# Altium PCB Pedal_Filters.PcbDoc (part 1 of 4)
Units mm, origin at the board's own origin, x right, y up, seen from the top; angles counter-clockwise.
Board outline 120.65 x 86.55 mm, 4 copper layers (Top Layer, Layer 1, Layer 2, Bottom Layer); 245 components, 181 nets, 879 pads, 470 vias.
Unrouted connection lines stored in the file: 24.
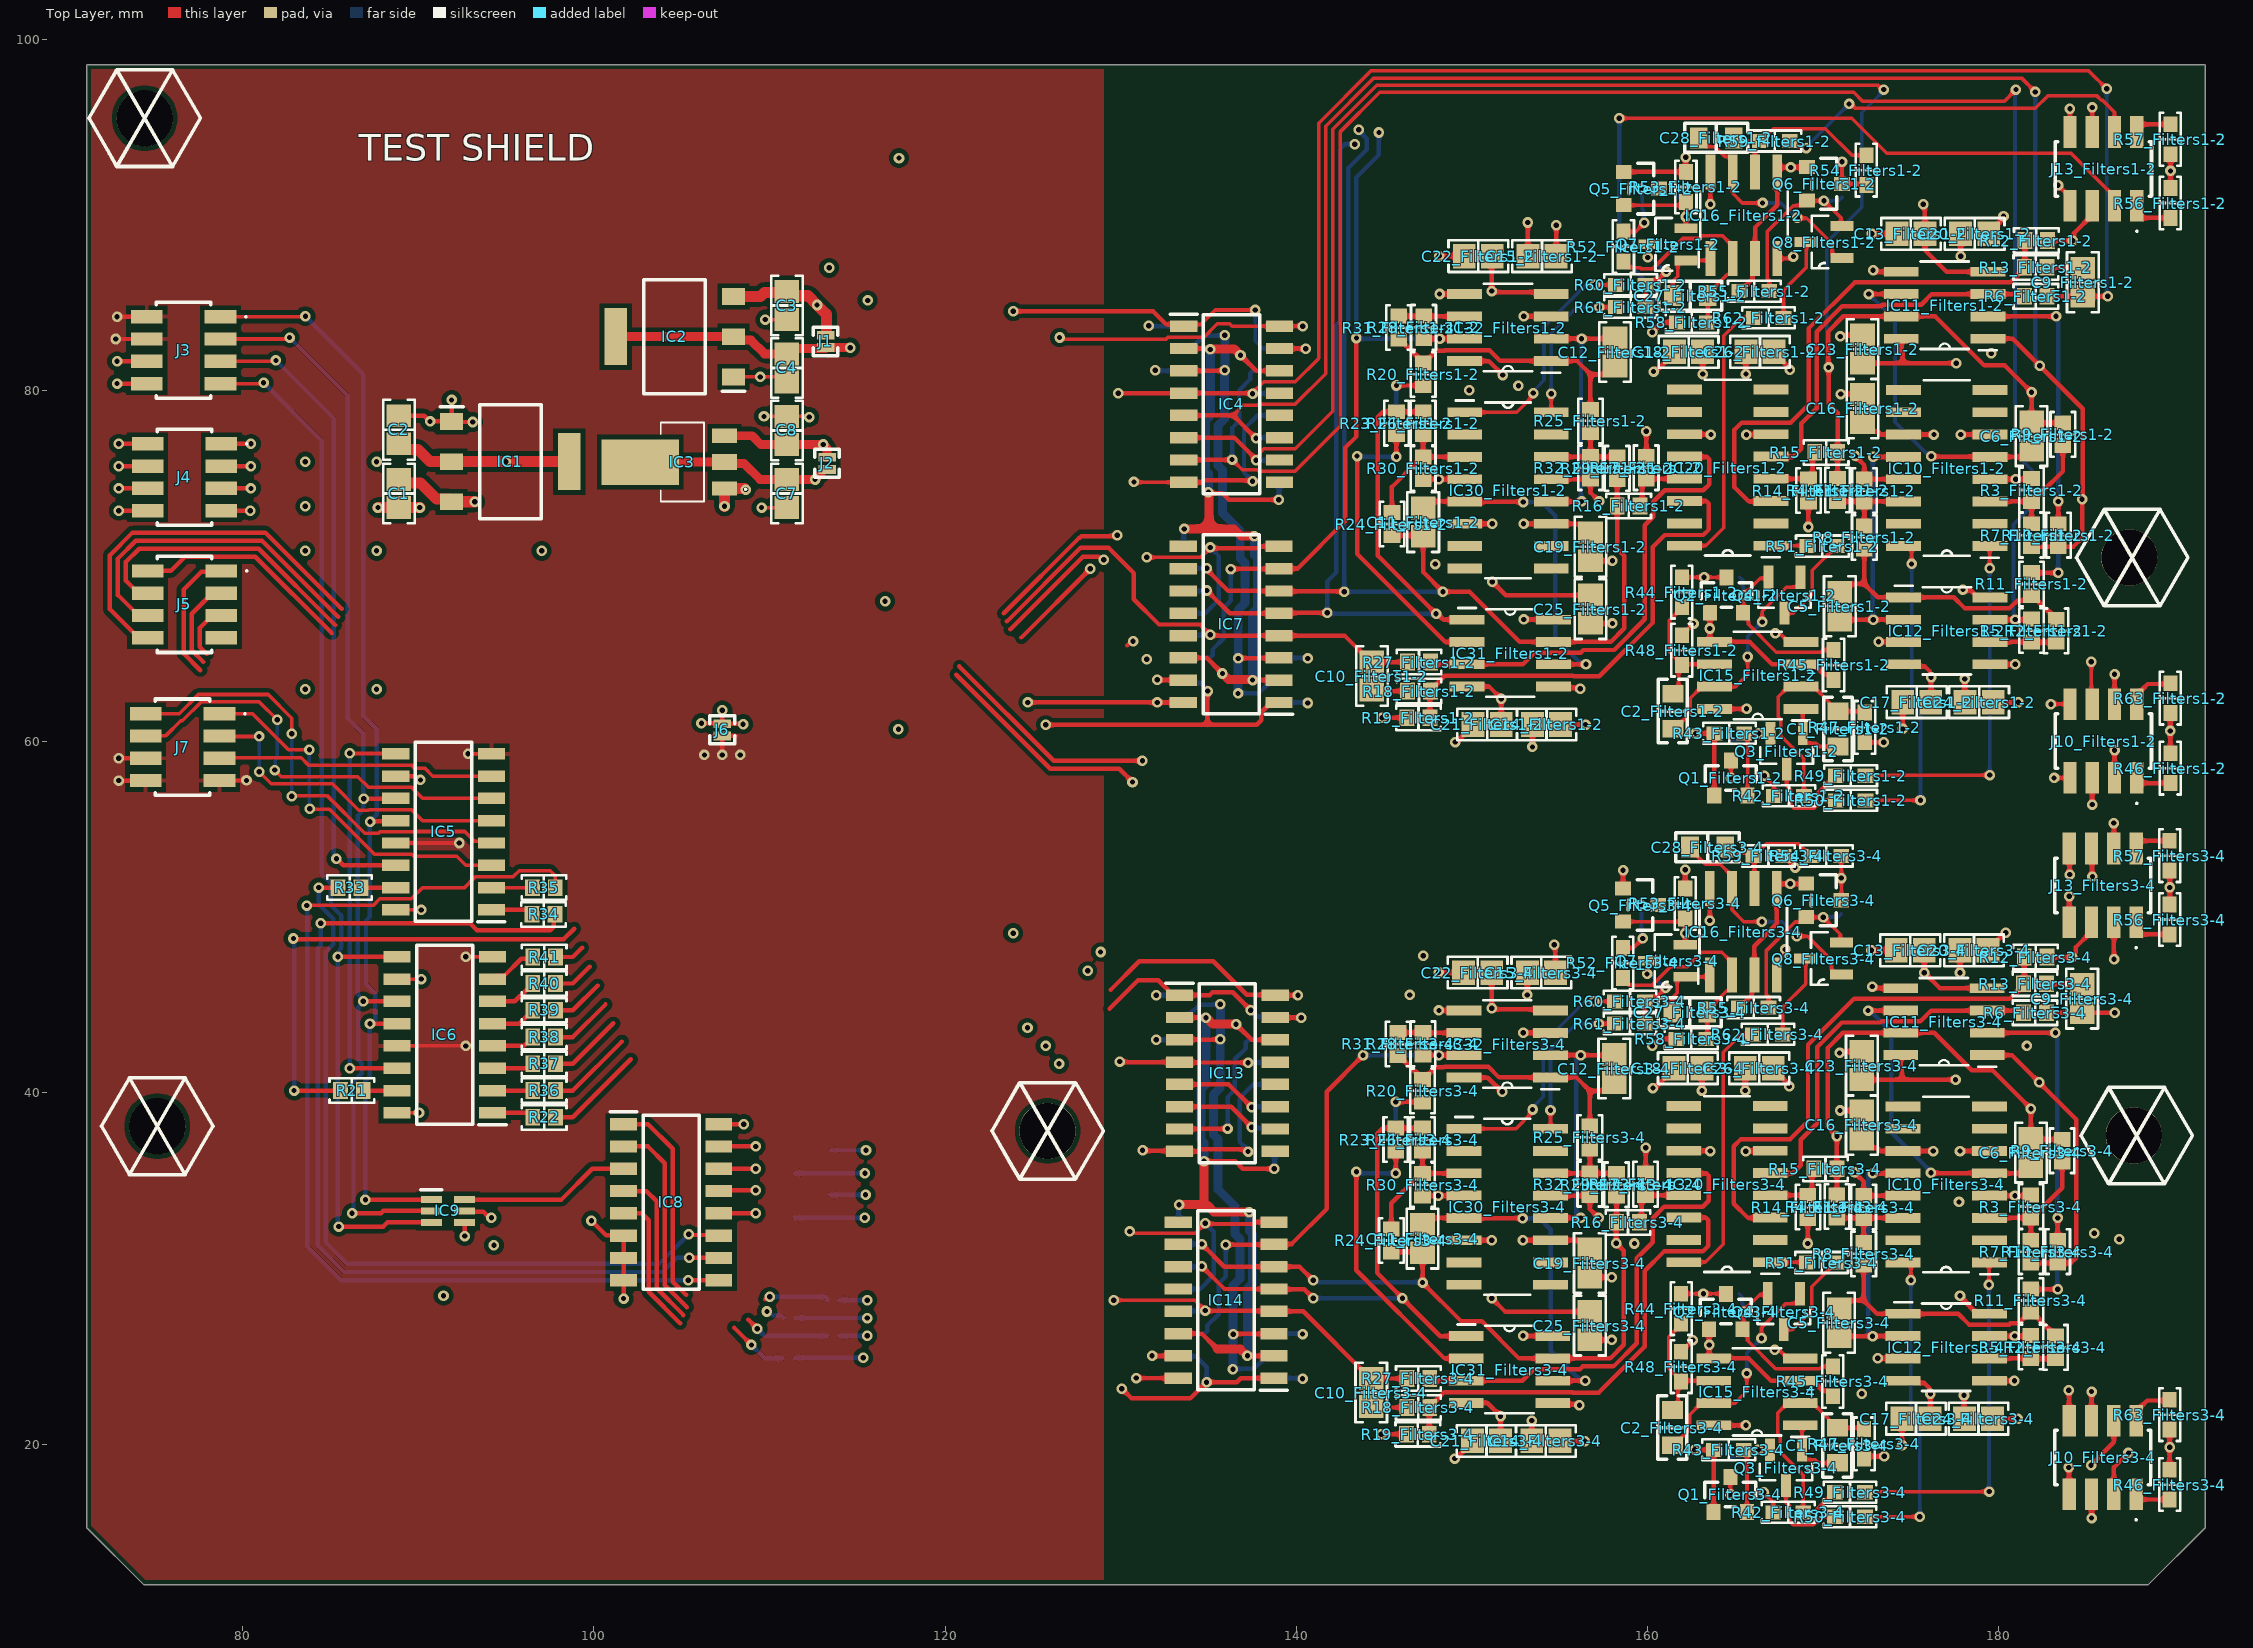
[diagram p0: Top Layer view]
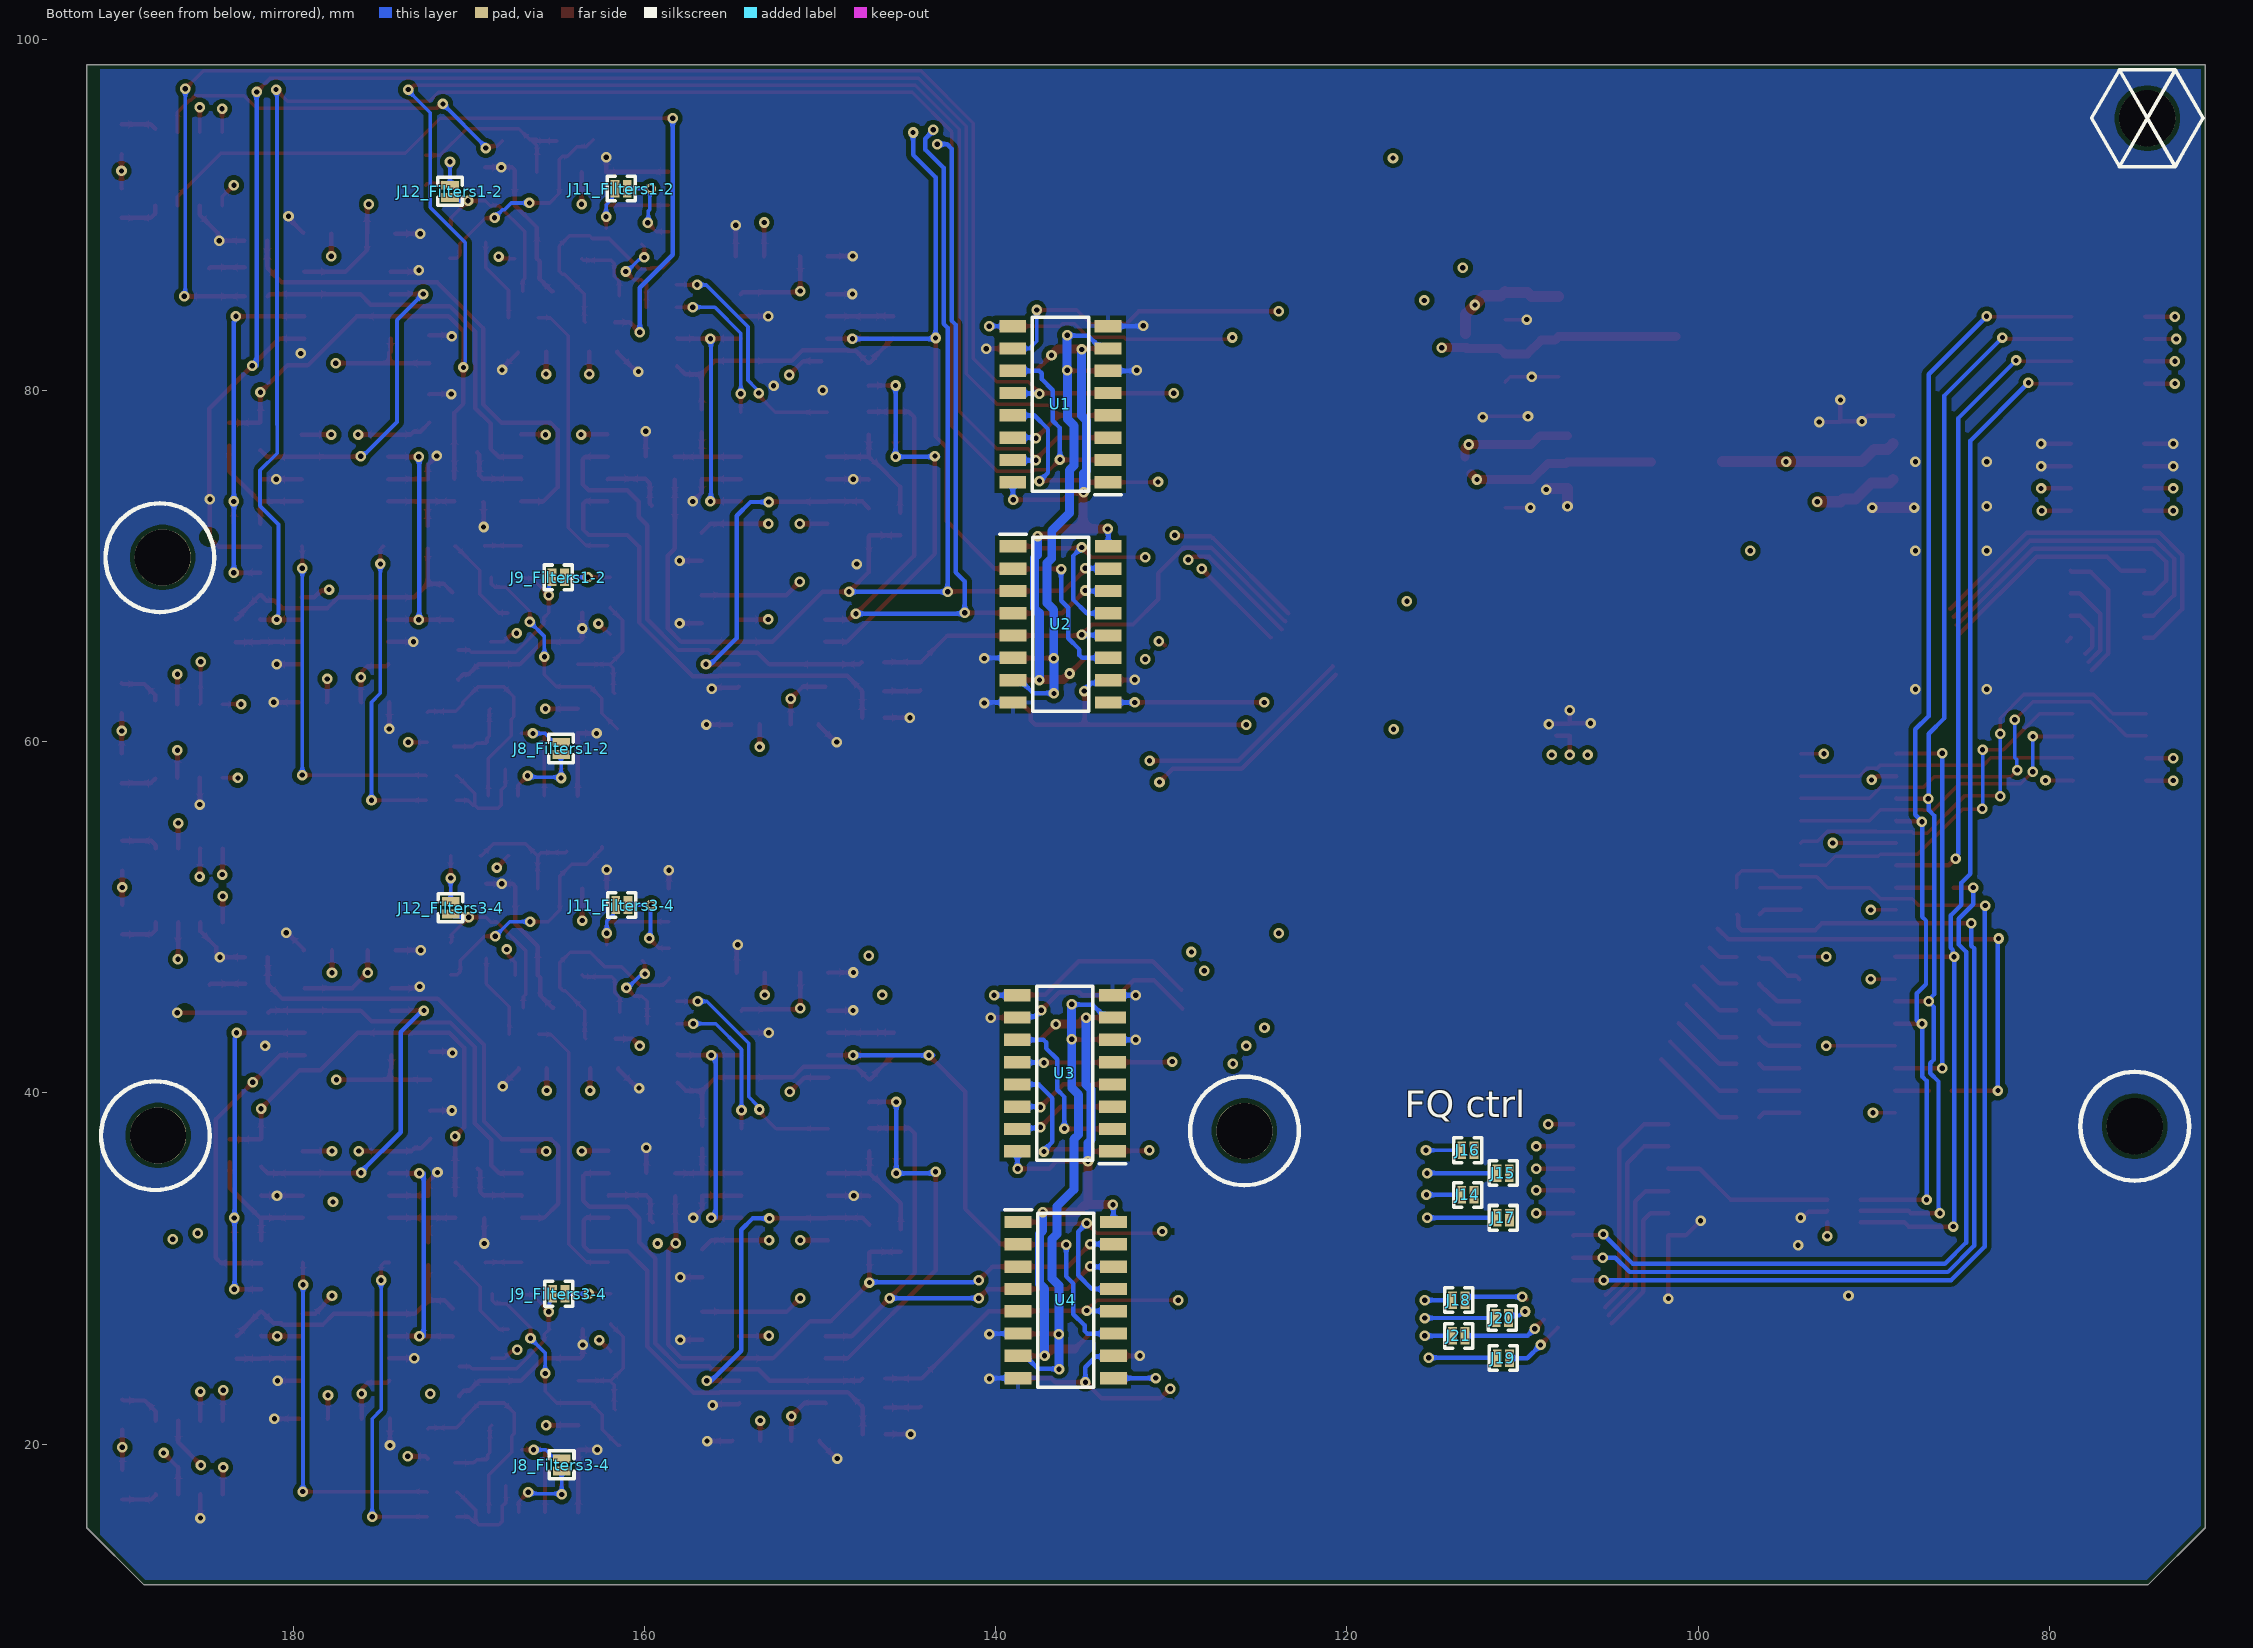
[diagram p1: Bottom Layer view, seen from below]
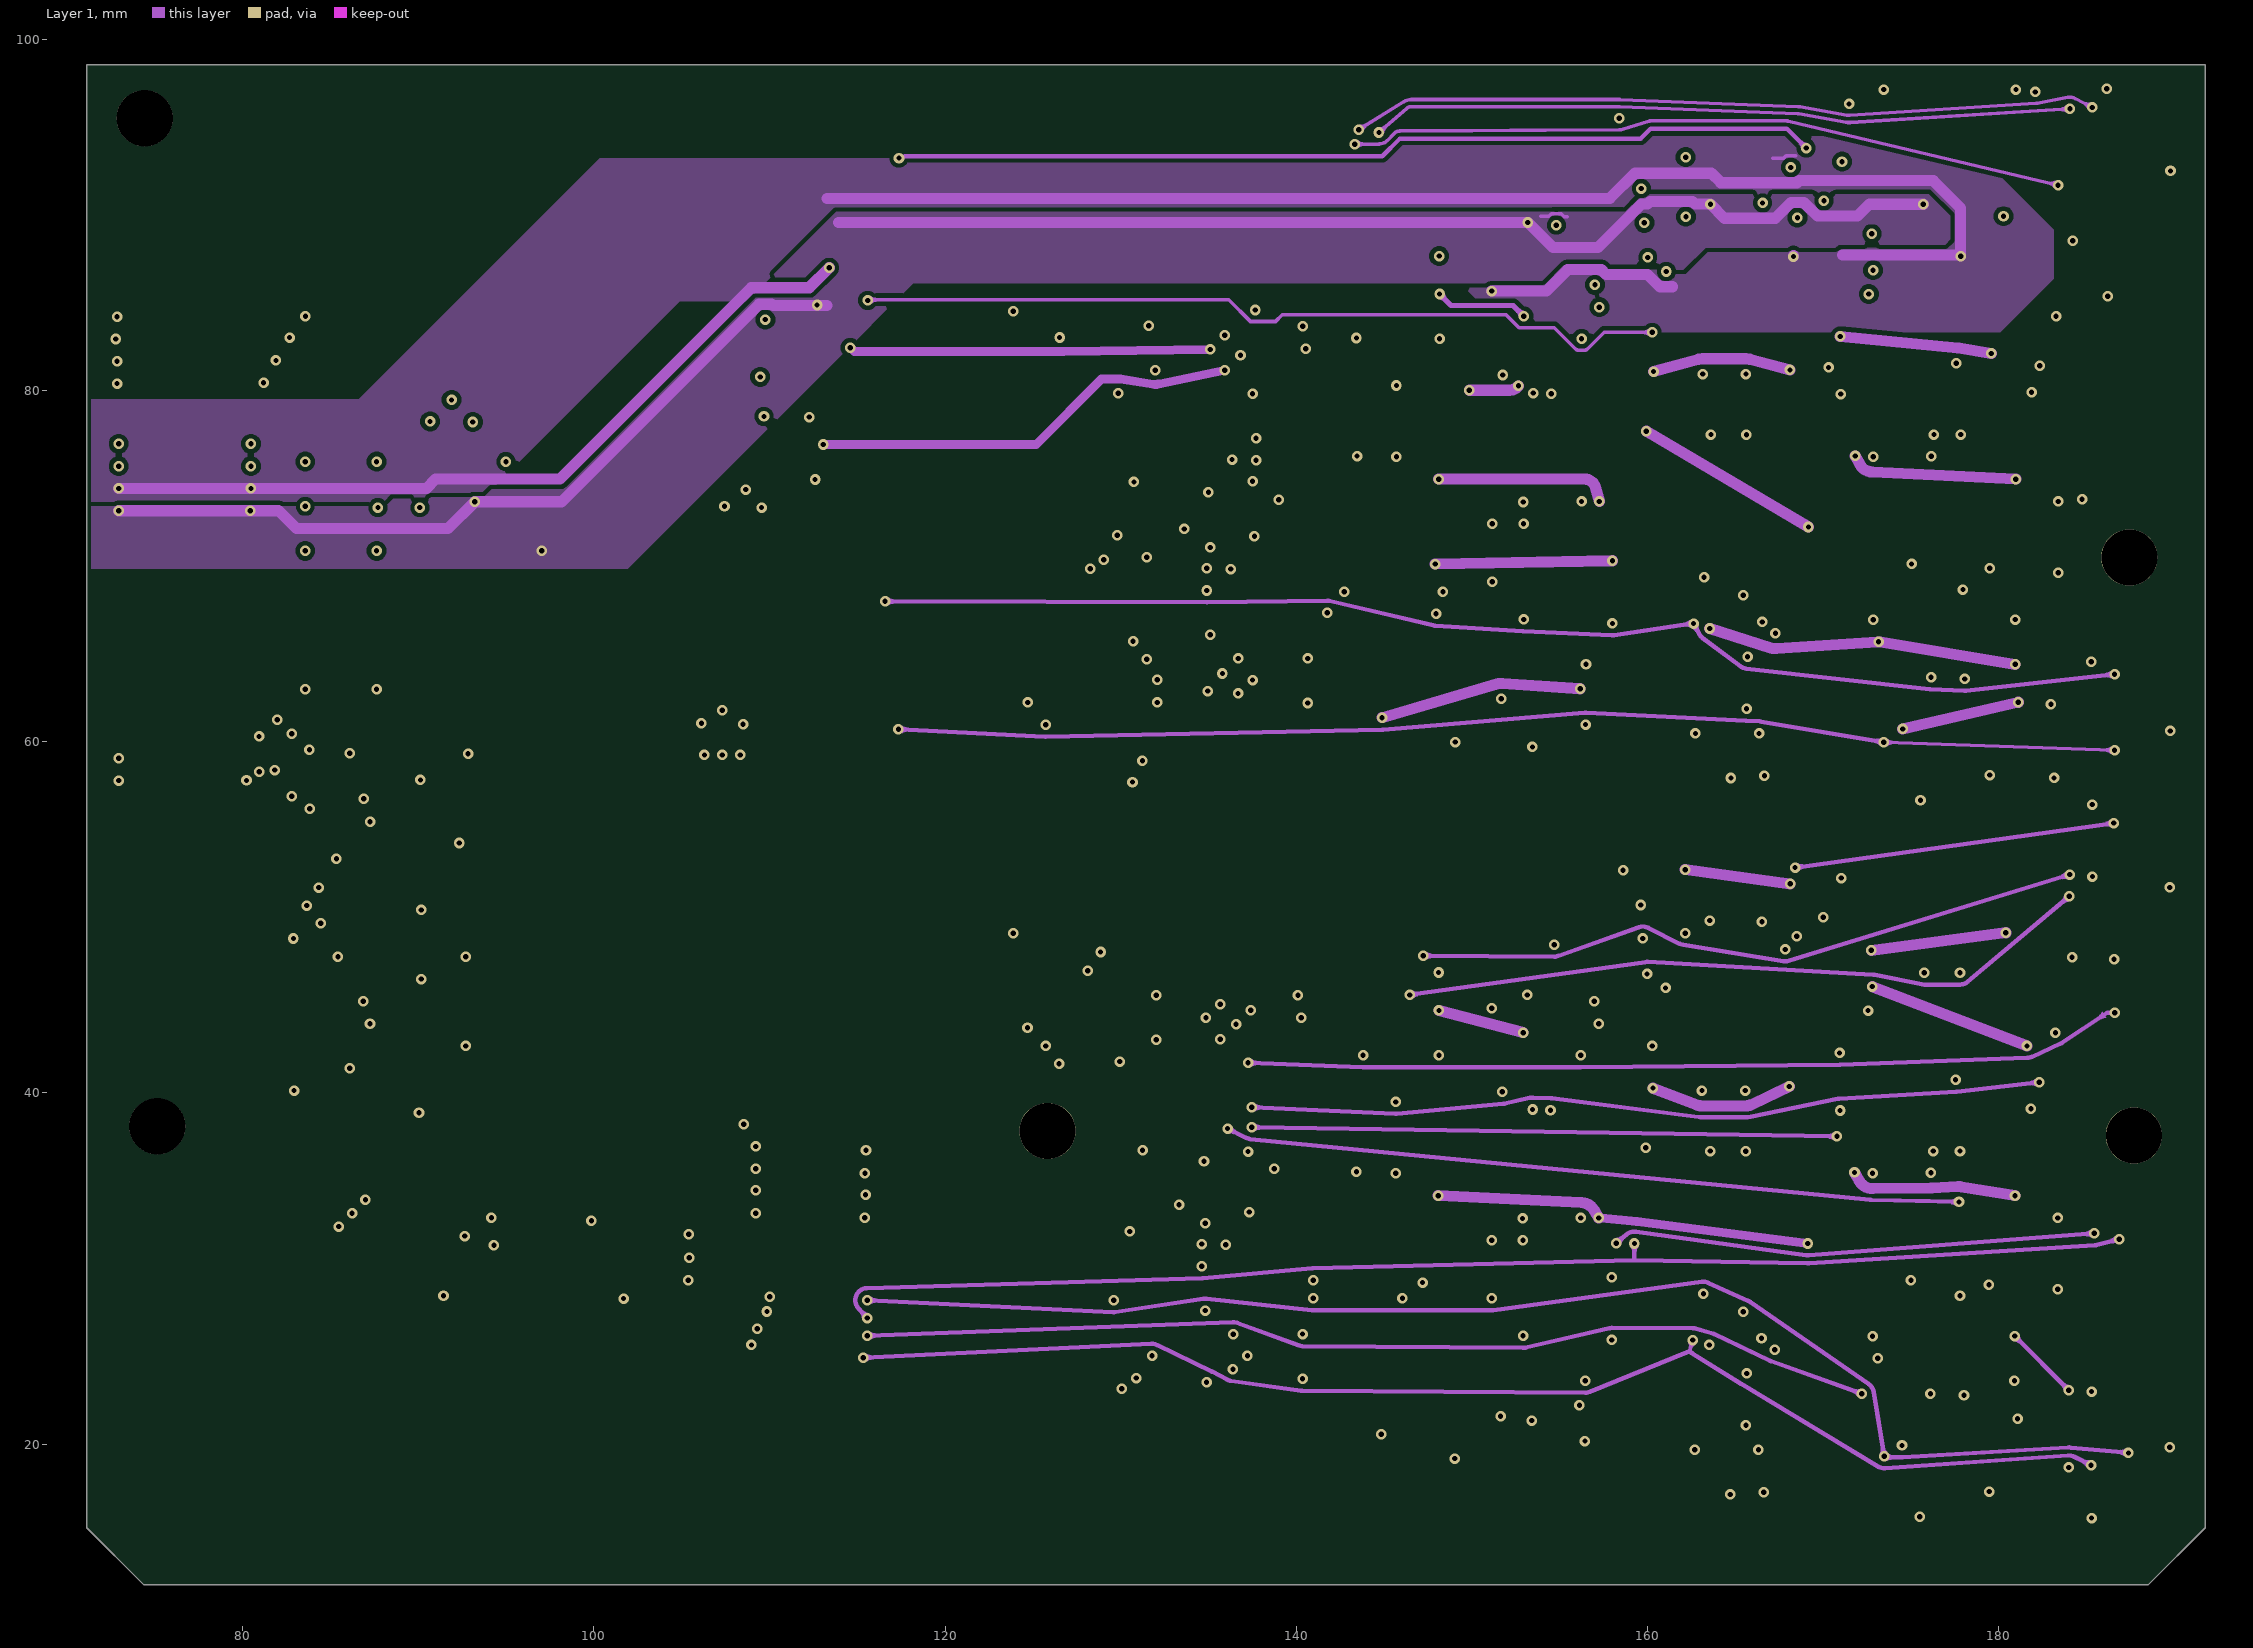
[diagram p2: Layer 1]
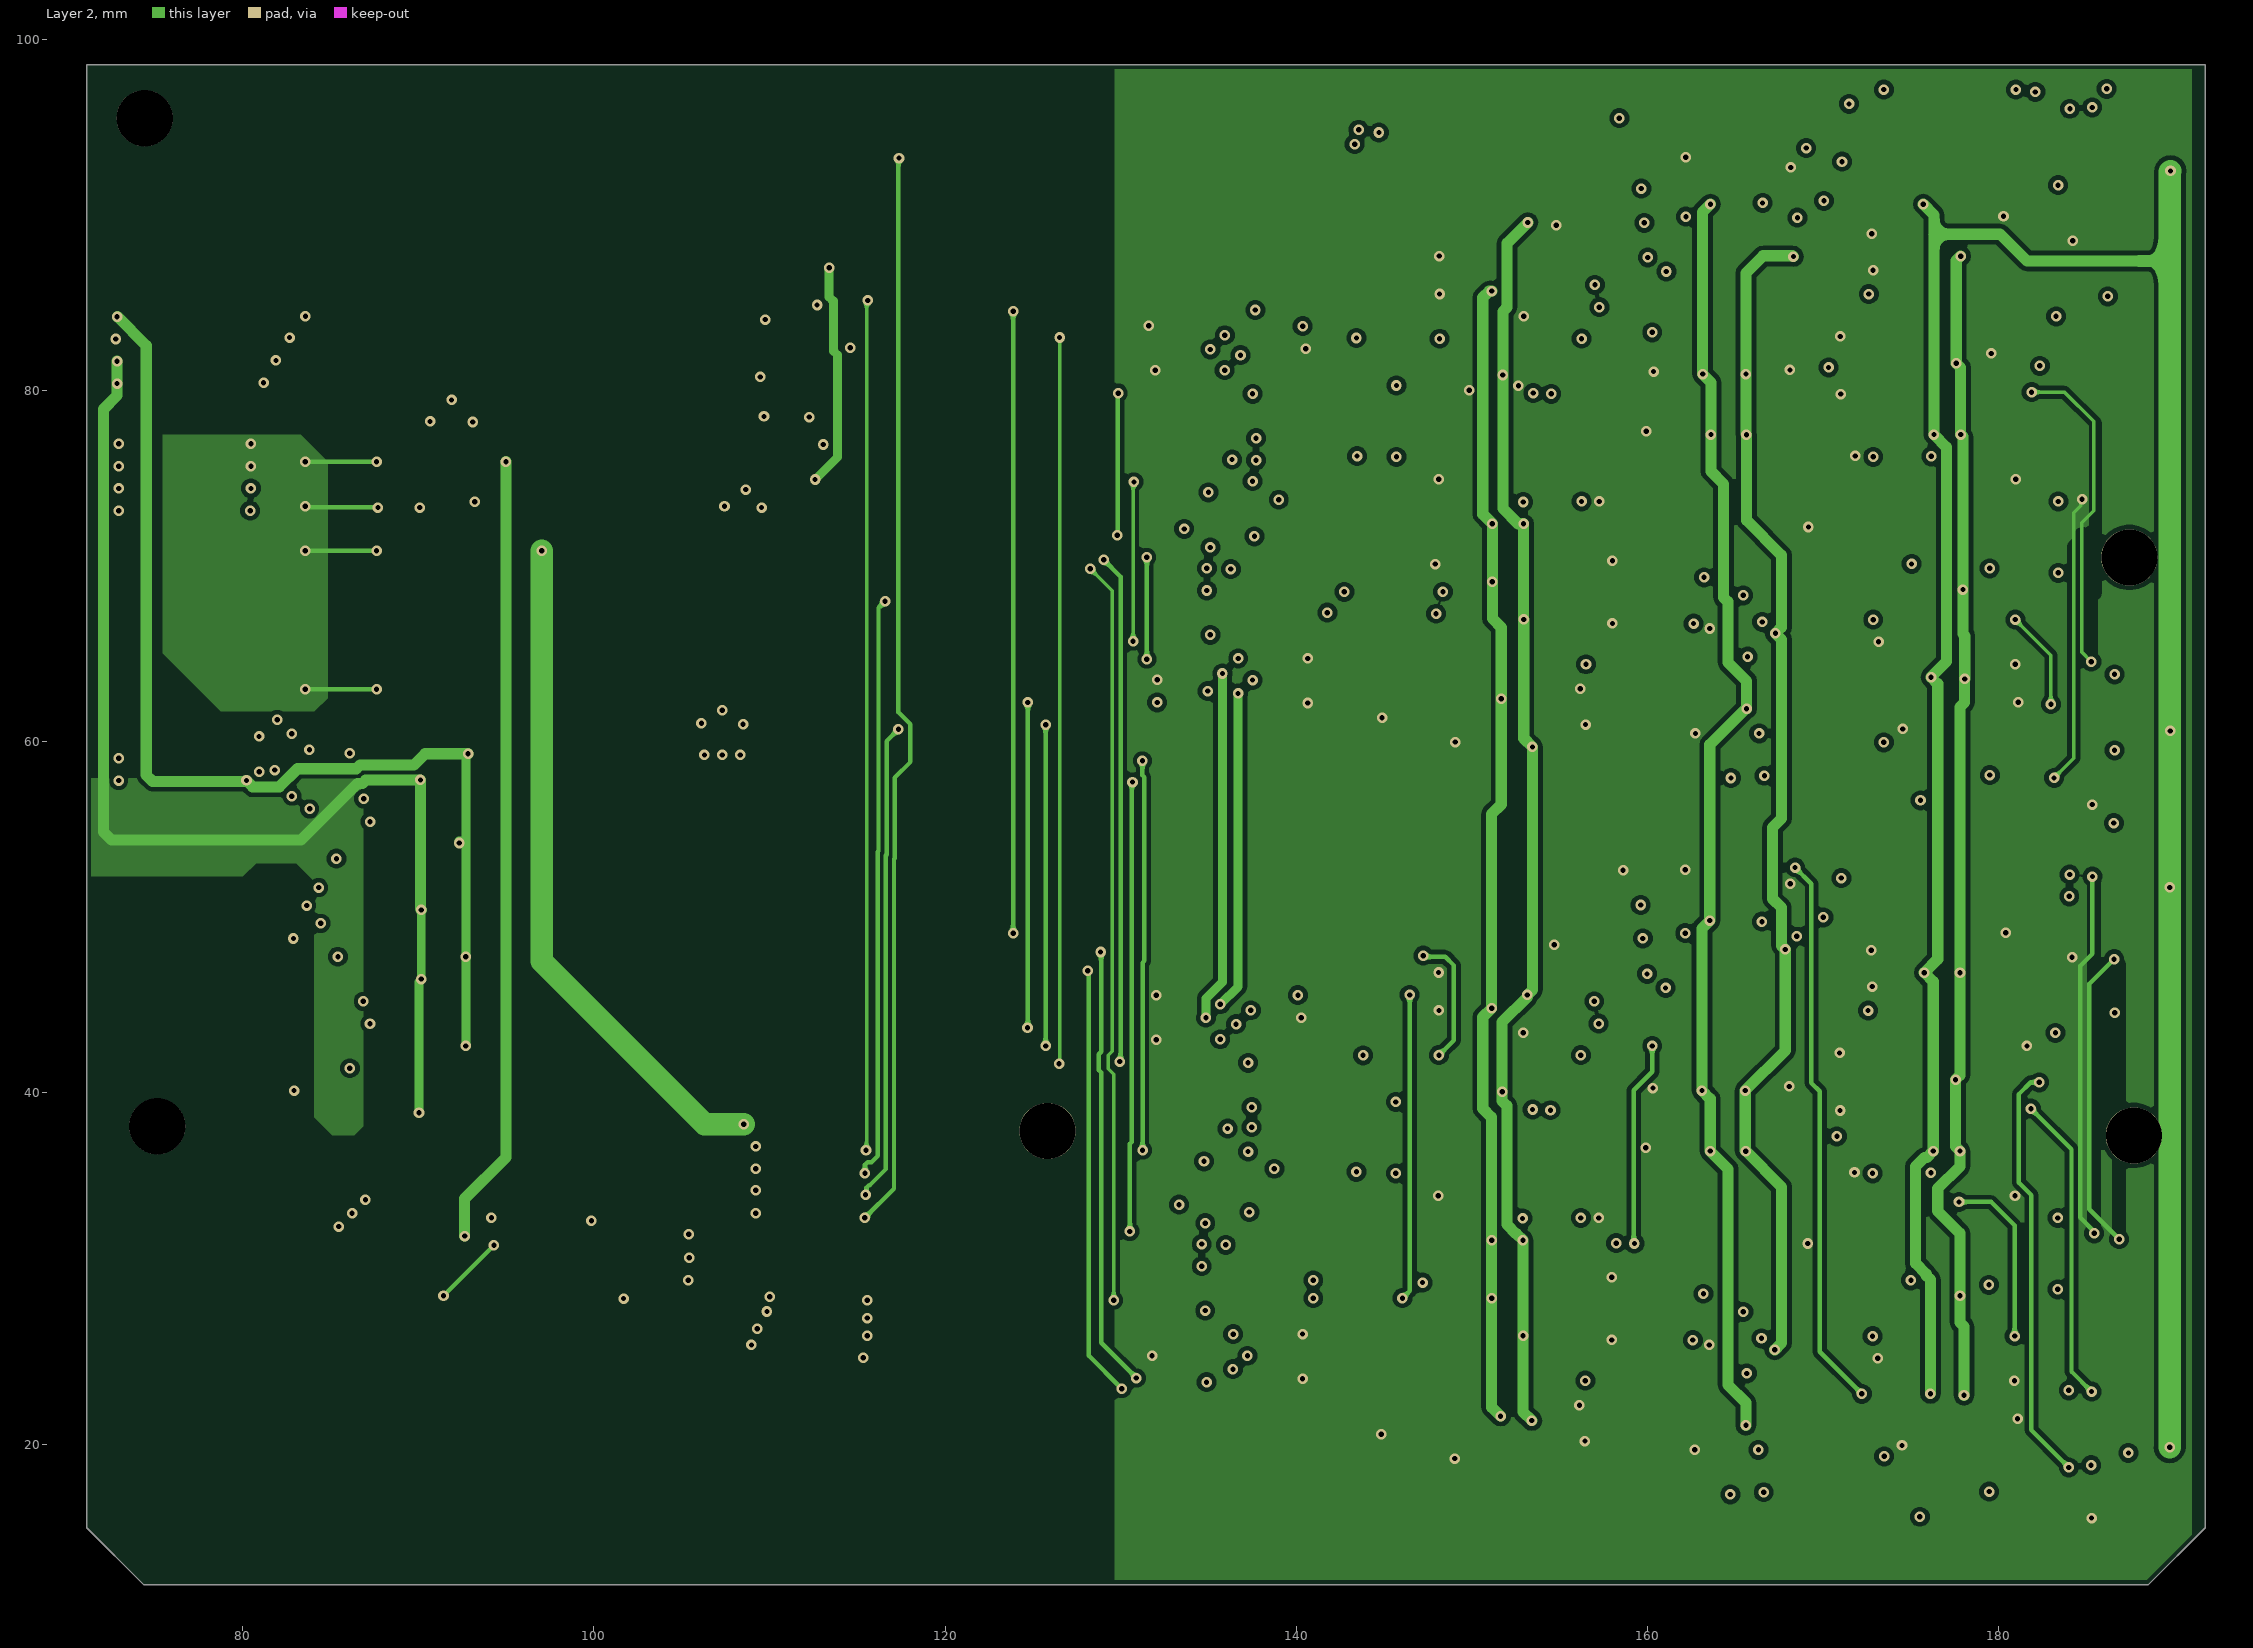
[diagram p3: Layer 2]
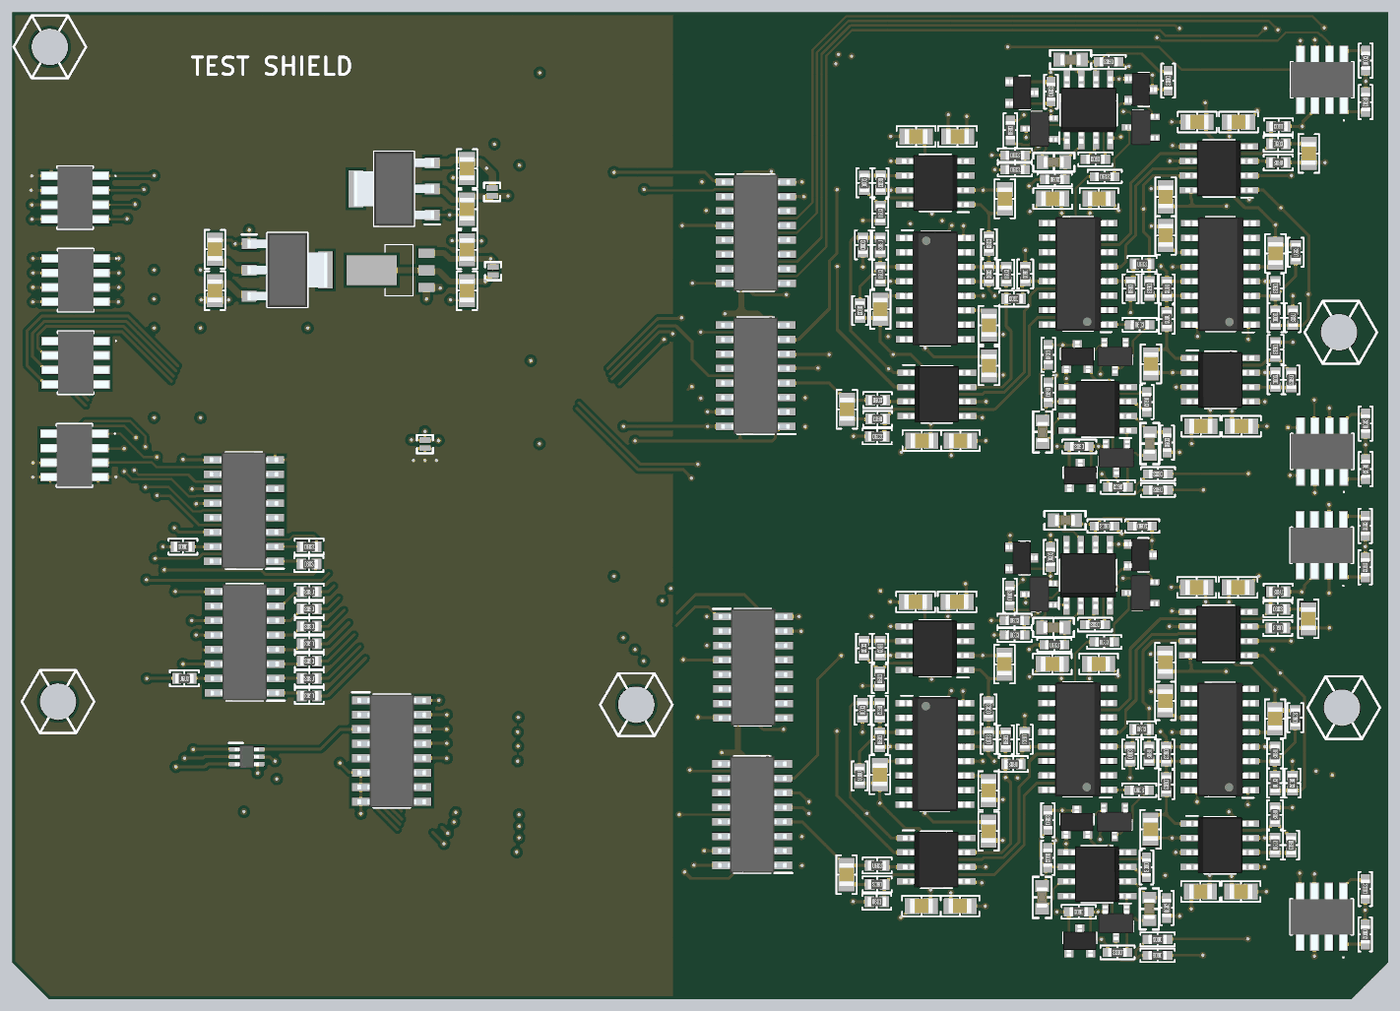
[diagram p7: 3D render of the assembled board from above, using the file's embedded part models]

## Layer stack, top to bottom
Top Solder: solder mask 0.0102, Solder Resist, Dk 3.5
Top Layer: signal copper 0.0356
Dielectric 2: prepreg 0.32, PP-006, Dk 4.1
Layer 1: signal copper 0.035
Dielectric 1: dielectric 0.32, FR-4, Dk 4.8
Layer 2: signal copper 0.035
Dielectric 3: prepreg 0.32, PP-006, Dk 4.1
Bottom Layer: signal copper 0.0356
Bottom Solder: solder mask 0.0102, Solder Resist, Dk 3.5

## Board outline
71.12,15.24 74.36,12 188.53,12 191.77,15.24 191.77,98.552 71.12,98.552

## Design rules (kind name [scope] priority, off if disabled: settings)
BoardOutlineClearance [All] p1: gap=0.254 ignorepadtopadclearanceinfootprint=FALSE except(0: Arc-SplitContinuation Track-SplitContinuation SMDPad-SplitContinuation THPad-SplitContinuation Via-SplitContinuation Fill-SplitContinuation Poly-SplitContinuation Region-SplitContinuation Text-SplitContinuation)
Clearance [All] p1: gap=0.254 ignorepadtopadclearanceinfootprint=TRUE except(0.203: Arc-Arc Arc-Track Arc-SMDPad Track-Track Track-SMDPad)
HoleSize [All] p1: absolutevalues=TRUE maxlimit=4 minlimit=0.025 maxpercent=80.000 minpercent=20.000
MinimumSolderMaskSliver [All] p1: minsoldermaskwidth=0.102
PolygonConnect PolygonConnect_11 [All vs InNet('+5v_DAC')] p1: thpad.connectstyle=Relief thpad.reliefconductorwidth=0.254 thpad.reliefentries=4 thpad.polygonreliefangle="90 Angle" thpad.airgapwidth=0.254 smdpad.connectstyle=Relief smdpad.reliefconductorwidth=0.254 smdpad.reliefentries=4 smdpad.polygonreliefangle="90 Angle" smdpad.airgapwidth=0.254 via.connectstyle=Direct via.reliefconductorwidth=0.254 via.reliefentries=4 via.polygonreliefangle="90 Angle" via.airgapwidth=0.254
PolygonConnect PolygonConnect_10 [All vs InNet('+5')] p2: thpad.connectstyle=Relief thpad.reliefconductorwidth=0.254 thpad.reliefentries=4 thpad.polygonreliefangle="90 Angle" thpad.airgapwidth=0.254 smdpad.connectstyle=Relief smdpad.reliefconductorwidth=0.254 smdpad.reliefentries=4 smdpad.polygonreliefangle="90 Angle" smdpad.airgapwidth=0.254 via.connectstyle=Direct via.reliefconductorwidth=0.254 via.reliefentries=4 via.polygonreliefangle="90 Angle" via.airgapwidth=0.254
PolygonConnect PolygonConnect_9 [All vs InNet('DGND')] p3: thpad.connectstyle=Relief thpad.reliefconductorwidth=0.254 thpad.reliefentries=4 thpad.polygonreliefangle="90 Angle" thpad.airgapwidth=0.254 smdpad.connectstyle=Relief smdpad.reliefconductorwidth=0.254 smdpad.reliefentries=4 smdpad.polygonreliefangle="90 Angle" smdpad.airgapwidth=0.254 via.connectstyle=Direct via.reliefconductorwidth=0.254 via.reliefentries=4 via.polygonreliefangle="90 Angle" via.airgapwidth=0.254
PolygonConnect PolygonConnect_8 [All vs InNet('GND')] p4: thpad.connectstyle=Relief thpad.reliefconductorwidth=0.254 thpad.reliefentries=4 thpad.polygonreliefangle="90 Angle" thpad.airgapwidth=0.254 smdpad.connectstyle=Relief smdpad.reliefconductorwidth=0.254 smdpad.reliefentries=4 smdpad.polygonreliefangle="90 Angle" smdpad.airgapwidth=0.254 via.connectstyle=Direct via.reliefconductorwidth=0.254 via.reliefentries=4 via.polygonreliefangle="90 Angle" via.airgapwidth=0.254
PolygonConnect PolygonConnect_7 [All vs InNet('+12')] p5: thpad.connectstyle=Relief thpad.reliefconductorwidth=0.254 thpad.reliefentries=4 thpad.polygonreliefangle="90 Angle" thpad.airgapwidth=0.254 smdpad.connectstyle=Relief smdpad.reliefconductorwidth=0.254 smdpad.reliefentries=4 smdpad.polygonreliefangle="90 Angle" smdpad.airgapwidth=0.254 via.connectstyle=Direct via.reliefconductorwidth=0.254 via.reliefentries=4 via.polygonreliefangle="90 Angle" via.airgapwidth=0.254
PolygonConnect PolygonConnect_6 [All vs InNet('-12')] p6: thpad.connectstyle=Relief thpad.reliefconductorwidth=0.254 thpad.reliefentries=4 thpad.polygonreliefangle="90 Angle" thpad.airgapwidth=0.254 smdpad.connectstyle=Relief smdpad.reliefconductorwidth=0.254 smdpad.reliefentries=4 smdpad.polygonreliefangle="90 Angle" smdpad.airgapwidth=0.254 via.connectstyle=Direct via.reliefconductorwidth=0.254 via.reliefentries=4 via.polygonreliefangle="90 Angle" via.airgapwidth=0.254
PolygonConnect PolygonConnect_5 [All vs IsNamedPolygon('+V_MUX')] p7: thpad.connectstyle=Relief thpad.reliefconductorwidth=0.254 thpad.reliefentries=4 thpad.polygonreliefangle="90 Angle" thpad.airgapwidth=0.254 smdpad.connectstyle=Direct smdpad.reliefconductorwidth=0.254 smdpad.reliefentries=4 smdpad.polygonreliefangle="90 Angle" smdpad.airgapwidth=0.254 via.connectstyle=Direct via.reliefconductorwidth=0.254 via.reliefentries=4 via.polygonreliefangle="90 Angle" via.airgapwidth=0.254
PolygonConnect PolygonConnect_4 [All vs IsNamedPolygon('-V_MUX')] p8: thpad.connectstyle=Relief thpad.reliefconductorwidth=0.254 thpad.reliefentries=4 thpad.polygonreliefangle="90 Angle" thpad.airgapwidth=0.254 smdpad.connectstyle=Direct smdpad.reliefconductorwidth=0.254 smdpad.reliefentries=4 smdpad.polygonreliefangle="90 Angle" smdpad.airgapwidth=0.254 via.connectstyle=Direct via.reliefconductorwidth=0.254 via.reliefentries=4 via.polygonreliefangle="90 Angle" via.airgapwidth=0.254
PolygonConnect PolygonConnect_3 [All vs IsNamedPolygon('NETD1_1_L01_P003')] p9: thpad.connectstyle=Relief thpad.reliefconductorwidth=0.254 thpad.reliefentries=4 thpad.polygonreliefangle="90 Angle" thpad.airgapwidth=0.254 smdpad.connectstyle=Direct smdpad.reliefconductorwidth=0.254 smdpad.reliefentries=4 smdpad.polygonreliefangle="90 Angle" smdpad.airgapwidth=0.254 via.connectstyle=Direct via.reliefconductorwidth=0.254 via.reliefentries=4 via.polygonreliefangle="90 Angle" via.airgapwidth=0.254
PolygonConnect PolygonConnect_2 [All vs IsNamedPolygon('GND_L01_P005')] p10: thpad.connectstyle=Relief thpad.reliefconductorwidth=0.254 thpad.reliefentries=4 thpad.polygonreliefangle="90 Angle" thpad.airgapwidth=0.254 smdpad.connectstyle=Direct smdpad.reliefconductorwidth=0.254 smdpad.reliefentries=4 smdpad.polygonreliefangle="90 Angle" smdpad.airgapwidth=0.254 via.connectstyle=Direct via.reliefconductorwidth=0.254 via.reliefentries=4 via.polygonreliefangle="90 Angle" via.airgapwidth=0.254
PolygonConnect PolygonConnect_1 [All vs IsNamedPolygon('6V6_L01_P001')] p11: thpad.connectstyle=Relief thpad.reliefconductorwidth=0.254 thpad.reliefentries=4 thpad.polygonreliefangle="90 Angle" thpad.airgapwidth=0.254 smdpad.connectstyle=Direct smdpad.reliefconductorwidth=0.254 smdpad.reliefentries=4 smdpad.polygonreliefangle="90 Angle" smdpad.airgapwidth=0.254 via.connectstyle=Direct via.reliefconductorwidth=0.254 via.reliefentries=4 via.polygonreliefangle="90 Angle" via.airgapwidth=0.254
PolygonConnect [All] p12: connectstyle=Relief reliefconductorwidth=0.254 reliefentries=4 polygonreliefangle="90 Angle" airgapwidth=0.254
RoomDefinition Filters3-4 [InComponentClass('Filters3-4')] p1: confinementstyle=ConfineIn formatcopy=TRUE lockcomponents=FALSE outline 142.748,15.143 190.754,15.143 190.754,55.504 142.748,55.504
RoomDefinition Filters1-2 [InComponentClass('Filters1-2')] p2: confinementstyle=ConfineIn formatcopy=TRUE lockcomponents=FALSE outline 142.786,55.944 190.792,55.944 190.792,96.305 142.786,96.305
RoomDefinition Pedal_Filters [InComponentClass('Pedal_Filters')] p3: confinementstyle=ConfineIn formatcopy=TRUE lockcomponents=FALSE outline 0,0 50.8,0 50.8,25.4 0,25.4
RoutingVias [All] p1: holewidth=0.3 width=0.6 viastyle="Through Hole" minholewidth=0.3 minwidth=0.6 maxholewidth=0.3 maxwidth=0.6
SolderMaskExpansion [All] p1: expansion=0.051 istentingtop=FALSE
Width [All] p1: maxlimit=1.27 minlimit=0.203 preferedwidth=0.203
28 further rules are at their usual default settings.

## Classes and differential pairs
channel class 2Filters: Filters1-2 Filters3-4
component class Filters3-4: C1_Filters3-4 C2_Filters3-4 C5_Filters3-4 C6_Filters3-4 C9_Filters3-4 C10_Filters3-4 C11_Filters3-4 C12_Filters3-4 C13_Filters3-4 C14_Filters3-4 C15_Filters3-4 C16_Filters3-4 C17_Filters3-4 C18_Filters3-4 C19_Filters3-4 C20_Filters3-4 C21_Filters3-4 C22_Filters3-4 C23_Filters3-4 C24_Filters3-4 C25_Filters3-4 C26_Filters3-4 C27_Filters3-4 C28_Filters3-4 IC10_Filters3-4 IC11_Filters3-4 IC12_Filters3-4 IC15_Filters3-4 IC16_Filters3-4 IC20_Filters3-4 IC30_Filters3-4 IC31_Filters3-4 IC32_Filters3-4 J8_Filters3-4 J9_Filters3-4 J10_Filters3-4 J11_Filters3-4 J12_Filters3-4 J13_Filters3-4 Q1_Filters3-4 Q2_Filters3-4 Q3_Filters3-4 Q4_Filters3-4 Q5_Filters3-4 Q6_Filters3-4 Q7_Filters3-4 Q8_Filters3-4 R1_Filters3-4 R2_Filters3-4 R3_Filters3-4 R4_Filters3-4 R5_Filters3-4 R6_Filters3-4 R7_Filters3-4 R8_Filters3-4 R9_Filters3-4 R10_Filters3-4 R11_Filters3-4 R12_Filters3-4 R13_Filters3-4 R14_Filters3-4 R15_Filters3-4 R16_Filters3-4 R17_Filters3-4 R18_Filters3-4 R19_Filters3-4 R20_Filters3-4 R23_Filters3-4 R24_Filters3-4 R25_Filters3-4 R26_Filters3-4 R27_Filters3-4 R28_Filters3-4 R29_Filters3-4 R30_Filters3-4 R31_Filters3-4 R32_Filters3-4 R42_Filters3-4 R43_Filters3-4 R44_Filters3-4 R45_Filters3-4 R46_Filters3-4 R47_Filters3-4 R48_Filters3-4 R49_Filters3-4 R50_Filters3-4 R51_Filters3-4 R52_Filters3-4 R53_Filters3-4 R54_Filters3-4 R55_Filters3-4 R56_Filters3-4 R57_Filters3-4 R58_Filters3-4 R59_Filters3-4 R60_Filters3-4 R61_Filters3-4 R62_Filters3-4 R63_Filters3-4
component class Filters1-2: C1_Filters1-2 C2_Filters1-2 C5_Filters1-2 C6_Filters1-2 C9_Filters1-2 C10_Filters1-2 C11_Filters1-2 C12_Filters1-2 C13_Filters1-2 C14_Filters1-2 C15_Filters1-2 C16_Filters1-2 C17_Filters1-2 C18_Filters1-2 C19_Filters1-2 C20_Filters1-2 C21_Filters1-2 C22_Filters1-2 C23_Filters1-2 C24_Filters1-2 C25_Filters1-2 C26_Filters1-2 C27_Filters1-2 C28_Filters1-2 IC10_Filters1-2 IC11_Filters1-2 IC12_Filters1-2 IC15_Filters1-2 IC16_Filters1-2 IC20_Filters1-2 IC30_Filters1-2 IC31_Filters1-2 IC32_Filters1-2 J8_Filters1-2 J9_Filters1-2 J10_Filters1-2 J11_Filters1-2 J12_Filters1-2 J13_Filters1-2 Q1_Filters1-2 Q2_Filters1-2 Q3_Filters1-2 Q4_Filters1-2 Q5_Filters1-2 Q6_Filters1-2 Q7_Filters1-2 Q8_Filters1-2 R1_Filters1-2 R2_Filters1-2 R3_Filters1-2 R4_Filters1-2 R5_Filters1-2 R6_Filters1-2 R7_Filters1-2 R8_Filters1-2 R9_Filters1-2 R10_Filters1-2 R11_Filters1-2 R12_Filters1-2 R13_Filters1-2 R14_Filters1-2 R15_Filters1-2 R16_Filters1-2 R17_Filters1-2 R18_Filters1-2 R19_Filters1-2 R20_Filters1-2 R23_Filters1-2 R24_Filters1-2 R25_Filters1-2 R26_Filters1-2 R27_Filters1-2 R28_Filters1-2 R29_Filters1-2 R30_Filters1-2 R31_Filters1-2 R32_Filters1-2 R42_Filters1-2 R43_Filters1-2 R44_Filters1-2 R45_Filters1-2 R46_Filters1-2 R47_Filters1-2 R48_Filters1-2 R49_Filters1-2 R50_Filters1-2 R51_Filters1-2 R52_Filters1-2 R53_Filters1-2 R54_Filters1-2 R55_Filters1-2 R56_Filters1-2 R57_Filters1-2 R58_Filters1-2 R59_Filters1-2 R60_Filters1-2 R61_Filters1-2 R62_Filters1-2 R63_Filters1-2
component class Pedal_Filters: C1 C2 C3 C4 C7 C8 IC1 IC2 IC3 IC4 IC5 IC6 IC7 IC8 IC9 IC13 IC14 J1 J2 J3 J4 J5 J7 J14 J15 J16 J17 J18 J19 J20 J21 R21 R22 R33 R34 R35 R36 R37 R38 R39 R40 R41 U1 U2 U3 U4

## Components (designator, comment, footprint, x,y, rotation, side; value= is the part's Value field where it differs from the comment)
C1 "=VALUE" "CAP 0805_2012" 88.9,74.13 r90 top
C1_Filters1-2 "10000 pF" "MURATA GRM188 0603_1608" 170.853,60.725 r90 top (schematic designator C1)
C1_Filters3-4 "10000 pF" "MURATA GRM188 0603_1608" 170.815,19.924 r90 top (schematic designator C1)
C2 "=VALUE" "CAP 0805_2012" 88.9,77.762 r270 top
C2_Filters1-2 "10000 pF" "MURATA GRM188 0603_1608" 161.455,61.741 r90 top (schematic designator C2)
C2_Filters3-4 "10000 pF" "MURATA GRM188 0603_1608" 161.417,20.94 r90 top (schematic designator C2)
C3 "=VALUE" "CAP 0805_2012" 110.998,84.836 r270 top
C4 "=VALUE" "CAP 0805_2012" 110.998,81.28 r90 top
C5_Filters1-2 "Value" "CAP 0805_2012" 170.955,67.71 r270 top (schematic designator C5)
C5_Filters3-4 "Value" "CAP 0805_2012" 170.917,26.909 r270 top (schematic designator C5)
C6_Filters1-2 "Value" "CAP 0805_2012" 181.877,77.4 r270 top (schematic designator C6)
C6_Filters3-4 "Value" "CAP 0805_2012" 181.839,36.599 r270 top (schematic designator C6)
C7 "=VALUE" "CAP 0805_2012" 110.998,74.13 r270 top
C8 "=VALUE" "CAP 0805_2012" 110.998,77.724 r90 top
C9_Filters1-2 "Value" "CAP 0805_2012" 184.798,86.163 r270 top (schematic designator C9)
C9_Filters3-4 "Value" "CAP 0805_2012" 184.76,45.362 r270 top (schematic designator C9)
C10_Filters1-2 "Value" "CAP 0805_2012" 144.31,63.735 r90 top (schematic designator C10)
C10_Filters3-4 "Value" "CAP 0805_2012" 144.272,22.934 r90 top (schematic designator C10)
C11_Filters1-2 "Value" "CAP 0805_2012" 147.231,72.498 r90 top (schematic designator C11)
C11_Filters3-4 "Value" "CAP 0805_2012" 147.193,31.697 r90 top (schematic designator C11)
C12_Filters1-2 "Value" "CAP 0805_2012" 158.153,82.188 r90 top (schematic designator C12)
C12_Filters3-4 "Value" "CAP 0805_2012" 158.115,41.387 r90 top (schematic designator C12)
C13_Filters1-2 "Value" "CAP 0805_2012" 175.006,88.919 r180 top (schematic designator C13)
C13_Filters3-4 "Value" "CAP 0805_2012" 174.968,48.118 r180 top (schematic designator C13)
C14_Filters1-2 "Value" "CAP 0805_2012" 154.254,60.979 r0 top (schematic designator C14)
C14_Filters3-4 "Value" "CAP 0805_2012" 154.216,20.178 r0 top (schematic designator C14)
C15_Filters1-2 "Value" "CAP 0805_2012" 154,87.649 r0 top (schematic designator C15)
C15_Filters3-4 "Value" "CAP 0805_2012" 153.962,46.848 r0 top (schematic designator C15)
C16_Filters1-2 "Value" "CAP 0805_2012" 172.25,78.975 r90 top (schematic designator C16)
C16_Filters3-4 "Value" "CAP 0805_2012" 172.212,38.174 r90 top (schematic designator C16)
C17_Filters1-2 "Value" "CAP 0805_2012" 175.336,62.249 r180 top (schematic designator C17)
C17_Filters3-4 "Value" "CAP 0805_2012" 175.298,21.448 r180 top (schematic designator C17)
C18_Filters1-2 "Value" "CAP 0805_2012" 162.344,82.203 r180 top (schematic designator C18)
C18_Filters3-4 "Value" "CAP 0805_2012" 162.306,41.402 r180 top (schematic designator C18)
C19_Filters1-2 "Value" "CAP 0805_2012" 156.756,71.101 r270 top (schematic designator C19)
C19_Filters3-4 "Value" "CAP 0805_2012" 156.718,30.3 r270 top (schematic designator C19)
C20_Filters1-2 "Value" "CAP 0805_2012" 178.638,88.919 r180 top (schematic designator C20)
C20_Filters3-4 "Value" "CAP 0805_2012" 178.6,48.118 r180 top (schematic designator C20)
C21_Filters1-2 "Value" "CAP 0805_2012" 150.876,60.979 r0 top (schematic designator C21)
C21_Filters3-4 "Value" "CAP 0805_2012" 150.838,20.178 r0 top (schematic designator C21)
C22_Filters1-2 "Value" "CAP 0805_2012" 150.368,87.649 r0 top (schematic designator C22)
C22_Filters3-4 "Value" "CAP 0805_2012" 150.33,46.848 r0 top (schematic designator C22)
C23_Filters1-2 "Value" "CAP 0805_2012" 172.25,82.353 r270 top (schematic designator C23)
C23_Filters3-4 "Value" "CAP 0805_2012" 172.212,41.552 r270 top (schematic designator C23)
C24_Filters1-2 "Value" "CAP 0805_2012" 178.892,62.249 r180 top (schematic designator C24)
C24_Filters3-4 "Value" "CAP 0805_2012" 178.854,21.448 r180 top (schematic designator C24)
C25_Filters1-2 "Value" "CAP 0805_2012" 156.756,67.545 r90 top (schematic designator C25)
C25_Filters3-4 "Value" "CAP 0805_2012" 156.718,26.744 r90 top (schematic designator C25)
C26_Filters1-2 "Value" "CAP 0805_2012" 166.408,82.203 r180 top (schematic designator C26)
C26_Filters3-4 "Value" "CAP 0805_2012" 166.37,41.402 r180 top (schematic designator C26)
C27_Filters1-2 "10000 pF" "MURATA GRM188 0603_1608" 162.446,85.404 r0 top (schematic designator C27)
C27_Filters3-4 "10000 pF" "MURATA GRM188 0603_1608" 162.408,44.602 r0 top (schematic designator C27)
C28_Filters1-2 "10000 pF" "MURATA GRM188 0603_1608" 163.915,94.387 r0 top (schematic designator C28)
C28_Filters3-4 "10000 pF" "MURATA GRM188 0603_1608" 163.424,54 r0 top (schematic designator C28)
IC1 "AMS1117-5.0" SOT-223 95.25,75.946 r0 top
IC2 "AMS1117-5.0/AMS1117-6.0" SOT-223 104.6,83.062 r180 top
IC3 "79L06/79L05" 79L06 105.042,75.922 r90 top
IC4 "DG409MY_PR-T" SOIC127P600X175-16N 136.318,79.216 r0 top
IC5 "74HC595D_BJ_" SOIC127P600X175-16N 91.44,54.864 r180 top
IC6 "74HC595D_BJ_" SOIC127P600X175-16N 91.509,43.307 r180 top
IC7 "DG409MY_PR-T" SOIC127P600X175-16N 136.293,66.677 r180 top
IC8 "CD4051BCM" SOIC127P599X175-16N 104.403,33.775 r0 top
IC9 "DAC7311IDCKR" SOT65P210X110-6N 91.694,33.274 r0 top
IC10_Filters1-2 "LM13700N_NOPB" SOIC-16 177.051,75.584 r180 top (schematic designator IC10)
IC10_Filters3-4 "LM13700N_NOPB" SOIC-16 177.013,34.783 r180 top (schematic designator IC10)
IC11_Filters1-2 "TL072ACP" SOIC-8 176.924,84.855 r180 top (schematic designator IC11)
IC11_Filters3-4 "TL072ACP" SOIC-8 176.886,44.054 r180 top (schematic designator IC11)
IC12_Filters1-2 "TL072ACP" SOIC-8 177.051,66.313 r0 top (schematic designator IC12)
IC12_Filters3-4 "TL072ACP" SOIC-8 177.013,25.512 r0 top (schematic designator IC12)
IC13 "DG409MY_PR-T" SOIC127P600X175-16N 136.077,41.116 r0 top
IC14 "DG409MY_PR-T" SOIC127P600X175-16N 136.002,28.196 r180 top
IC15_Filters1-2 "TL072ACP" SOIC-8 166.281,63.773 r180 top (schematic designator IC15)
IC15_Filters3-4 "TL072ACP" SOIC-8 166.243,22.972 r180 top (schematic designator IC15)
IC16_Filters1-2 "TL072ACP" SOIC-8 165.494,89.976 r90 top (schematic designator IC16)
IC16_Filters3-4 "TL072ACP" SOIC-8 165.456,49.174 r90 top (schematic designator IC16)
IC20_Filters1-2 "LM13700N_NOPB" SOIC-16 164.575,75.605 r180 top (schematic designator IC20)
IC20_Filters3-4 "LM13700N_NOPB" SOIC-16 164.537,34.804 r180 top (schematic designator IC20)
IC30_Filters1-2 "LM13700N_NOPB" SOIC-16 152.057,74.314 r0 top (schematic designator IC30)
IC30_Filters3-4 "LM13700N_NOPB" SOIC-16 152.019,33.513 r0 top (schematic designator IC30)
IC31_Filters1-2 "TL072ACP" SOIC-8 152.184,65.043 r0 top (schematic designator IC31)
IC31_Filters3-4 "TL072ACP" SOIC-8 152.146,24.242 r0 top (schematic designator IC31)
IC32_Filters1-2 "TL072ACP" SOIC-8 152.053,83.582 r180 top (schematic designator IC32)
IC32_Filters3-4 "TL072ACP" SOIC-8 152.015,42.78 r180 top (schematic designator IC32)
J1 "" "CON: JUMPER x1" 113.197,82.44 r90 top
J2 "" "CON: JUMPER x1" 113.284,76.2 r270 top
J3 "LPPB042NFSS-RC" LPPB042NFSSRC 76.64,82.296 r270 top
J4 "LPPB042NFSS-RC" LPPB042NFSSRC 76.686,75.057 r270 top
J5 "LPPB042NFSS-RC" LPPB042NFSSRC 76.686,67.818 r270 top
J6 "" "CON: JUMPER x1" 107.315,60.325 r90 top
J7 "LPPB042NFSS-RC" LPPB042NFSSRC 76.581,59.69 r270 top
J8_Filters1-2 "Linear" "CON: JUMPER x1" 164.757,59.263 r90 bottom (schematic designator J8)
J8_Filters3-4 "Linear" "CON: JUMPER x1" 164.719,18.462 r90 bottom (schematic designator J8)
J9_Filters1-2 "Linear" "CON: JUMPER x1" 164.565,69.361 r0 bottom (schematic designator J9)
J9_Filters3-4 "Linear" "CON: JUMPER x1" 164.527,28.56 r0 bottom (schematic designator J9)
J10_Filters1-2 "F1 FQ & OUT" LPPB042NFSSRC 185.966,60.037 r180 top (schematic designator J10)
J10_Filters3-4 "F1 FQ & OUT" LPPB042NFSSRC 185.928,19.236 r180 top (schematic designator J10)
J11_Filters1-2 "Linear" "CON: JUMPER x1" 160.984,91.5 r0 bottom (schematic designator J11)
J11_Filters3-4 "Linear" "CON: JUMPER x1" 160.946,50.698 r0 bottom (schematic designator J11)
J12_Filters1-2 "Linear" "CON: JUMPER x1" 171.082,91.692 r270 bottom (schematic designator J12)
J12_Filters3-4 "Linear" "CON: JUMPER x1" 171.044,50.89 r270 bottom (schematic designator J12)
J13_Filters1-2 "F2 FQ & OUT" LPPB042NFSSRC 185.966,92.617 r180 top (schematic designator J13)
J13_Filters3-4 "F2 FQ & OUT" LPPB042NFSSRC 185.928,51.816 r180 top (schematic designator J13)
J14 "Linear" "CON: JUMPER x1" 112.767,34.194 r0 bottom
J15 "Linear" "CON: JUMPER x1" 110.76,35.43 r0 bottom
J16 "Linear" "CON: JUMPER x1" 112.766,36.73 r0 bottom
J17 "FQ ctrl" "CON: JUMPER x1" 110.744,32.886 r0 bottom
J18 "Linear" "CON: JUMPER x1" 113.284,28.194 r0 bottom
J19 "Linear" "CON: JUMPER x1" 110.744,24.892 r0 bottom
J20 "Linear" "CON: JUMPER x1" 110.806,27.178 r0 bottom
J21 "Linear" "CON: JUMPER x1" 113.284,26.162 r0 bottom
Q1_Filters1-2 "MMBT3904-7-F" "DIODES SOT-23-3" 164.757,57.931 r90 top (schematic designator Q1)
Q1_Filters3-4 "MMBT3904-7-F" "DIODES SOT-23-3" 164.719,17.13 r90 top (schematic designator Q1)
Q2_Filters1-2 "MMBT3904-7-F" "DIODES SOT-23-3" 164.503,68.345 r90 top (schematic designator Q2)
Q2_Filters3-4 "MMBT3904-7-F" "DIODES SOT-23-3" 164.465,27.544 r90 top (schematic designator Q2)
Q3_Filters1-2 "3906" SOT-23 167.932,59.455 r270 top (schematic designator Q3)
Q3_Filters3-4 "3906" SOT-23 167.894,18.654 r270 top (schematic designator Q3)
Q4_Filters1-2 "3906" SOT-23 167.805,68.345 r270 top (schematic designator Q4)
Q4_Filters3-4 "3906" SOT-23 167.767,27.544 r270 top (schematic designator Q4)
Q5_Filters1-2 "MMBT3904-7-F" "DIODES SOT-23-3" 159.652,91.5 r0 top (schematic designator Q5)
Q5_Filters3-4 "MMBT3904-7-F" "DIODES SOT-23-3" 159.614,50.698 r0 top (schematic designator Q5)
Q6_Filters1-2 "MMBT3904-7-F" "DIODES SOT-23-3" 170.082,91.77 r0 top (schematic designator Q6)
Q6_Filters3-4 "MMBT3904-7-F" "DIODES SOT-23-3" 170.044,50.968 r0 top (schematic designator Q6)
Q7_Filters1-2 "3906" SOT-23 161.176,88.325 r180 top (schematic designator Q7)
Q7_Filters3-4 "3906" SOT-23 161.138,47.523 r180 top (schematic designator Q7)
Q8_Filters1-2 "3906" SOT-23 170.066,88.452 r180 top (schematic designator Q8)
Q8_Filters3-4 "3906" SOT-23 170.028,47.65 r180 top (schematic designator Q8)
R1_Filters1-2 "220 Ohms" "RES 0603_1608" 172.352,74.299 r270 top (schematic designator R1)
R1_Filters3-4 "220 Ohms" "RES 0603_1608" 172.314,33.498 r270 top (schematic designator R1)
R2_Filters1-2 "100 kOhms" "RES 0603_1608" 183.274,66.313 r270 top (schematic designator R2)
R2_Filters3-4 "100 kOhms" "RES 0603_1608" 183.236,25.512 r270 top (schematic designator R2)
R3_Filters1-2 "220 Ohms" "RES 0603_1608" 181.877,74.329 r270 top (schematic designator R3)
R3_Filters3-4 "220 Ohms" "RES 0603_1608" 181.839,33.528 r270 top (schematic designator R3)
R4_Filters1-2 "10 kOhms" "RES 0603_1608" 170.828,74.329 r270 top (schematic designator R4)
R4_Filters3-4 "10 kOhms" "RES 0603_1608" 170.79,33.528 r270 top (schematic designator R4)
R5_Filters1-2 "47 kOhms" "RES 0603_1608" 181.877,66.328 r90 top (schematic designator R5)
R5_Filters3-4 "47 kOhms" "RES 0603_1608" 181.839,25.527 r90 top (schematic designator R5)
R6_Filters1-2 "47 kOhms" "RES 0603_1608" 182.116,85.363 r180 top (schematic designator R6)
R6_Filters3-4 "47 kOhms" "RES 0603_1608" 182.078,44.562 r180 top (schematic designator R6)
R7_Filters1-2 "10 kOhms" "RES 0603_1608" 181.877,71.759 r90 top (schematic designator R7)
R7_Filters3-4 "10 kOhms" "RES 0603_1608" 181.839,30.958 r90 top (schematic designator R7)
R8_Filters1-2 "10 kOhms" "RES 0603_1608" 172.352,71.632 r270 top (schematic designator R8)
R8_Filters3-4 "10 kOhms" "RES 0603_1608" 172.314,30.831 r270 top (schematic designator R8)
R9_Filters1-2 "10 kOhms" "RES 0603_1608" 183.655,77.504 r90 top (schematic designator R9)
R9_Filters3-4 "10 kOhms" "RES 0603_1608" 183.617,36.703 r90 top (schematic designator R9)
R10_Filters1-2 "100 kOhms" "RES 0603_1608" 183.401,71.759 r270 top (schematic designator R10)
R10_Filters3-4 "100 kOhms" "RES 0603_1608" 183.363,30.958 r270 top (schematic designator R10)
R11_Filters1-2 "100 kOhms" "RES 0603_1608" 181.877,68.98 r270 top (schematic designator R11)
R11_Filters3-4 "100 kOhms" "RES 0603_1608" 181.839,28.179 r270 top (schematic designator R11)
R12_Filters1-2 "220 Ohms" "RES 0603_1608" 182.146,88.538 r180 top (schematic designator R12)
R12_Filters3-4 "220 Ohms" "RES 0603_1608" 182.108,47.737 r180 top (schematic designator R12)
R13_Filters1-2 "10 kOhms" "RES 0603_1608" 182.116,87.014 r0 top (schematic designator R13)
R13_Filters3-4 "10 kOhms" "RES 0603_1608" 182.078,46.213 r0 top (schematic designator R13)
R14_Filters1-2 "220 Ohms" "RES 0603_1608" 169.177,74.299 r90 top (schematic designator R14)
R14_Filters3-4 "220 Ohms" "RES 0603_1608" 169.139,33.498 r90 top (schematic designator R14)
R15_Filters1-2 "10 kOhms" "RES 0603_1608" 170.178,76.473 r0 top (schematic designator R15)
R15_Filters3-4 "10 kOhms" "RES 0603_1608" 170.14,35.672 r0 top (schematic designator R15)
R16_Filters1-2 "10 kOhms" "RES 0603_1608" 158.93,73.425 r180 top (schematic designator R16)
R16_Filters3-4 "10 kOhms" "RES 0603_1608" 158.892,32.624 r180 top (schematic designator R16)
R17_Filters1-2 "220 Ohms" "RES 0603_1608" 159.931,75.599 r270 top (schematic designator R17)
R17_Filters3-4 "220 Ohms" "RES 0603_1608" 159.893,34.798 r270 top (schematic designator R17)
R18_Filters1-2 "10 kOhms" "RES 0603_1608" 146.992,62.884 r180 top (schematic designator R18)
R18_Filters3-4 "10 kOhms" "RES 0603_1608" 146.954,22.083 r180 top (schematic designator R18)
R19_Filters1-2 "220 Ohms" "RES 0603_1608" 146.962,61.36 r0 top (schematic designator R19)
R19_Filters3-4 "220 Ohms" "RES 0603_1608" 146.924,20.559 r0 top (schematic designator R19)
R20_Filters1-2 "100 kOhms" "RES 0603_1608" 147.231,80.918 r90 top (schematic designator R20)
R20_Filters3-4 "100 kOhms" "RES 0603_1608" 147.193,40.117 r90 top (schematic designator R20)
R21 "220 Ohms" "RES 0603_1608" 86.218,40.132 r0 top
R22 "220 Ohms" "RES 0603_1608" 97.17,38.608 r180 top
R23_Filters1-2 "100 kOhms" "RES 0603_1608" 145.707,78.139 r90 top (schematic designator R23)
R23_Filters3-4 "100 kOhms" "RES 0603_1608" 145.669,37.338 r90 top (schematic designator R23)
R24_Filters1-2 "10 kOhms" "RES 0603_1608" 145.453,72.394 r270 top (schematic designator R24)
R24_Filters3-4 "10 kOhms" "RES 0603_1608" 145.415,31.593 r270 top (schematic designator R24)
R25_Filters1-2 "10 kOhms" "RES 0603_1608" 156.756,78.266 r90 top (schematic designator R25)
R25_Filters3-4 "10 kOhms" "RES 0603_1608" 156.718,37.465 r90 top (schematic designator R25)
R26_Filters1-2 "10 kOhms" "RES 0603_1608" 147.231,78.139 r270 top (schematic designator R26)
R26_Filters3-4 "10 kOhms" "RES 0603_1608" 147.193,37.338 r270 top (schematic designator R26)
R27_Filters1-2 "47 kOhms" "RES 0603_1608" 146.992,64.535 r0 top (schematic designator R27)
R27_Filters3-4 "47 kOhms" "RES 0603_1608" 146.954,23.734 r0 top (schematic designator R27)
R28_Filters1-2 "47 kOhms" "RES 0603_1608" 147.257,83.597 r270 top (schematic designator R28)
R28_Filters3-4 "47 kOhms" "RES 0603_1608" 147.219,42.795 r270 top (schematic designator R28)
R29_Filters1-2 "10 kOhms" "RES 0603_1608" 158.28,75.569 r90 top (schematic designator R29)
R29_Filters3-4 "10 kOhms" "RES 0603_1608" 158.242,34.768 r90 top (schematic designator R29)
R30_Filters1-2 "220 Ohms" "RES 0603_1608" 147.231,75.569 r90 top (schematic designator R30)
R30_Filters3-4 "220 Ohms" "RES 0603_1608" 147.193,34.768 r90 top (schematic designator R30)
R31_Filters1-2 "100 kOhms" "RES 0603_1608" 145.834,83.585 r90 top (schematic designator R31)
R31_Filters3-4 "100 kOhms" "RES 0603_1608" 145.796,42.784 r90 top (schematic designator R31)
R32_Filters1-2 "220 Ohms" "RES 0603_1608" 156.756,75.599 r90 top (schematic designator R32)
R32_Filters3-4 "220 Ohms" "RES 0603_1608" 156.718,34.798 r90 top (schematic designator R32)
R33 "220 Ohms" "RES 0603_1608" 86.091,51.689 r180 top
R34 "220 Ohms" "RES 0603_1608" 97.14,50.165 r0 top
R35 "220 Ohms" "RES 0603_1608" 97.155,51.689 r0 top
R36 "220 Ohms" "RES 0603_1608" 97.17,40.132 r180 top
R37 "220 Ohms" "RES 0603_1608" 97.17,41.656 r180 top
R38 "220 Ohms" "RES 0603_1608" 97.17,43.18 r180 top
R39 "220 Ohms" "RES 0603_1608" 97.17,44.704 r180 top
R40 "220 Ohms" "RES 0603_1608" 97.17,46.228 r180 top
R41 "220 Ohms" "RES 0603_1608" 97.17,47.737 r180 top
R42_Filters1-2 "33 kOhms" "YAGEO RES 0603_1608" 168.059,56.915 r180 top (schematic designator R42)
R42_Filters3-4 "33 kOhms" "YAGEO RES 0603_1608" 168.021,16.114 r180 top (schematic designator R42)
R43_Filters1-2 "1 kOhms" "YAGEO RES 0603_1608" 164.669,60.471 r180 top (schematic designator R43)
R43_Filters3-4 "1 kOhms" "YAGEO RES 0603_1608" 164.631,19.67 r180 top (schematic designator R43)
R44_Filters1-2 "33 kOhms" "YAGEO RES 0603_1608" 161.963,68.511 r90 top (schematic designator R44)
R44_Filters3-4 "33 kOhms" "YAGEO RES 0603_1608" 161.925,27.71 r90 top (schematic designator R44)
R45_Filters1-2 "1 kOhms" "YAGEO RES 0603_1608" 170.599,64.369 r270 top (schematic designator R45)
R45_Filters3-4 "1 kOhms" "YAGEO RES 0603_1608" 170.561,23.568 r270 top (schematic designator R45)
R46_Filters1-2 "120 kOhms" "YAGEO RES 0603_1608" 189.776,58.493 r270 top (schematic designator R46)
R46_Filters3-4 "120 kOhms" "YAGEO RES 0603_1608" 189.738,17.692 r270 top (schematic designator R46)
R47_Filters1-2 "330 kOhms" "YAGEO RES 0603_1608" 172.377,60.813 r90 top (schematic designator R47)
R47_Filters3-4 "330 kOhms" "YAGEO RES 0603_1608" 172.339,20.012 r90 top (schematic designator R47)
R48_Filters1-2 "330 kOhms" "YAGEO RES 0603_1608" 161.963,65.209 r270 top (schematic designator R48)
R48_Filters3-4 "330 kOhms" "YAGEO RES 0603_1608" 161.925,24.408 r270 top (schematic designator R48)
R49_Filters1-2 "6.8 kOhms" "YAGEO RES 0603_1608" 171.576,58.058 r180 top (schematic designator R49)
R49_Filters3-4 "6.8 kOhms" "YAGEO RES 0603_1608" 171.538,17.257 r180 top (schematic designator R49)
R50_Filters1-2 "6.8 kOhms" "YAGEO RES 0603_1608" 171.576,56.661 r180 top (schematic designator R50)
R50_Filters3-4 "6.8 kOhms" "YAGEO RES 0603_1608" 171.538,15.86 r180 top (schematic designator R50)
R51_Filters1-2 "6.8 kOhms" "YAGEO RES 0603_1608" 169.964,71.139 r0 top (schematic designator R51)
R51_Filters3-4 "6.8 kOhms" "YAGEO RES 0603_1608" 169.926,30.338 r0 top (schematic designator R51)
R52_Filters1-2 "33 kOhms" "YAGEO RES 0603_1608" 158.636,88.198 r90 top (schematic designator R52)
R52_Filters3-4 "33 kOhms" "YAGEO RES 0603_1608" 158.598,47.396 r90 top (schematic designator R52)
R53_Filters1-2 "1 kOhms" "YAGEO RES 0603_1608" 162.192,91.588 r90 top (schematic designator R53)
R53_Filters3-4 "1 kOhms" "YAGEO RES 0603_1608" 162.154,50.786 r90 top (schematic designator R53)
R54_Filters1-2 "33 kOhms" "YAGEO RES 0603_1608" 172.466,92.544 r270 top (schematic designator R54)
R54_Filters3-4 "33 kOhms" "YAGEO RES 0603_1608" 170.194,53.492 r0 top (schematic designator R54)
R55_Filters1-2 "1 kOhms" "YAGEO RES 0603_1608" 166.09,85.658 r180 top (schematic designator R55)
R55_Filters3-4 "1 kOhms" "YAGEO RES 0603_1608" 166.052,44.856 r180 top (schematic designator R55)
R56_Filters1-2 "120 kOhms" "YAGEO RES 0603_1608" 189.776,90.673 r270 top (schematic designator R56)
R56_Filters3-4 "120 kOhms" "YAGEO RES 0603_1608" 189.738,49.872 r270 top (schematic designator R56)
R57_Filters1-2 "120 kOhms" "YAGEO RES 0603_1608" 189.776,94.307 r90 top (schematic designator R57)
R57_Filters3-4 "120 kOhms" "YAGEO RES 0603_1608" 189.738,53.506 r90 top (schematic designator R57)
R58_Filters1-2 "330 kOhms" "YAGEO RES 0603_1608" 162.534,83.88 r0 top (schematic designator R58)
R58_Filters3-4 "330 kOhms" "YAGEO RES 0603_1608" 162.496,43.078 r0 top (schematic designator R58)
R59_Filters1-2 "330 kOhms" "YAGEO RES 0603_1608" 167.254,94.207 r180 top (schematic designator R59)
R59_Filters3-4 "330 kOhms" "YAGEO RES 0603_1608" 166.892,53.492 r180 top (schematic designator R59)
R60_Filters1-2 "6.8 kOhms" "YAGEO RES 0603_1608" 159.042,86.013 r0 top (schematic designator R60)
R60_Filters3-4 "6.8 kOhms" "YAGEO RES 0603_1608" 159.004,45.212 r0 top (schematic designator R60)
R61_Filters1-2 "6.8 kOhms" "YAGEO RES 0603_1608" 159.042,84.743 r0 top (schematic designator R61)
R61_Filters3-4 "6.8 kOhms" "YAGEO RES 0603_1608" 159.004,43.942 r0 top (schematic designator R61)
R62_Filters1-2 "6.8 kOhms" "YAGEO RES 0603_1608" 166.9,84.135 r0 top (schematic designator R62)
R62_Filters3-4 "6.8 kOhms" "YAGEO RES 0603_1608" 166.862,43.334 r0 top (schematic designator R62)
R63_Filters1-2 "120 kOhms" "YAGEO RES 0603_1608" 189.776,62.479 r90 top (schematic designator R63)
R63_Filters3-4 "120 kOhms" "YAGEO RES 0603_1608" 189.738,21.678 r90 top (schematic designator R63)
U1 "CD4052BCM" SOIC127P599X175-16N 136.318,79.216 r0 bottom
U2 "CD4052BCM" SOIC127P599X175-16N 136.306,66.677 r180 bottom
U3 "CD4052BCM" SOIC127P599X175-16N 136.064,41.116 r0 bottom
U4 "CD4052BCM" SOIC127P599X175-16N 136.015,28.196 r180 bottom

## Footprints (in the part's own frame and the unit in brackets; to place one, negate y for a bottom-side part, rotate by r counter-clockwise, add the part's x,y. Pads: shape width x height; smd on the part's side, far side on the other; paste and mask are expansions set on the pad)
79L06 [mm]
  rect 0.8x1.4 smd: 1(-1.5,-2.4) 3(1.5,-2.4)
  rect 0.9x1.4 smd: 2(0,-2.4)
  rect 2.6x4.4 smd: 4(0,2.4)
  silkscreen extent -2.25,-3.65 2.25,1.22
"CAP 0805_2012" [mm] "Chip Capacitor, 2-Leads, Body 2.00x1.20mm, IPC Medium Density"
  rect 1.3x1.4 smd: 1(-0.8,0) 2(0.8,0)
  silkscreen extent -1.7,-0.9 1.7,0.9, body extent -1,-0.64 1,0.64, height 1.26
"CON: JUMPER x1" [mm]
  rect 0.5x1 smd: 1(0,0) 2(0.7,0)
  silkscreen extent -0.45,-0.7 1.15,0.7
"DIODES SOT-23-3" [mm] "SOT23, 3-Leads, Body 2.90x2.40mm, Pitch 0.95mm, IPC Medium Density"
  rect 0.9x0.8 smd: 1(-1,0.95) 2(-1,-0.95) 3(1,0)
  silkscreen extent -0.7,-1.45 0.7,1.45, body extent -1.41,-1.45 1.41,1.45, height 1.5
LPPB042NFSSRC [mm]
  rect 0.76x1.8 smd: 1(-1.905,2.1) 2(-1.905,-2.1) 3(-0.635,2.1) 4(-0.635,-2.1) 5(0.635,2.1) 6(0.635,-2.1) 7(1.905,2.1) 8(1.905,-2.1)
  silkscreen extent -2.74,-1.55 2.74,3.6, body extent -2.74,-2.92 2.74,2.92, height 4.75
"MURATA GRM188 0603_1608" [mm] "Chip Capacitor, 2-Leads, Body 1.60x0.80mm"
  rect 1x1.2 smd: 1(-1,0) 2(1,0)
  silkscreen extent -1.8,-0.83 1.8,0.83, body extent -0.9,-0.5 0.9,0.5, height 1
"RES 0603_1608" [mm] "Chip Resistor, 2-Leads, Body 1.60x0.80mm, IPC Medium Density"
  rect 0.85x0.95 smd: 1(-0.65,0) 2(0.65,0)
  silkscreen extent -1.27,-0.7 1.27,0.7, body extent -0.8,-0.4 0.8,0.4, height 0.45
SOIC127P599X175-16N [mm]
  rect 1.526x0.7 smd: 1(-2.712,4.445) 2(-2.712,3.175) 3(-2.712,1.905) 4(-2.712,0.635) 5(-2.712,-0.635) 6(-2.712,-1.905) 7(-2.712,-3.175) 8(-2.712,-4.445) 9(2.712,-4.445) 10(2.712,-3.175) 11(2.712,-1.905) 12(2.712,-0.635) 13(2.712,0.635) 14(2.712,1.905) 15(2.712,3.175) 16(2.712,4.445)
  silkscreen extent -3.47,-4.95 1.6,5.15, body extent -3,-4.95 3,4.95, height 1.75
SOIC127P600X175-16N [mm]
  rect 1.55x0.65 smd: 1(-2.725,4.445) 2(-2.725,3.175) 3(-2.725,1.905) 4(-2.725,0.635) 5(-2.725,-0.635) 6(-2.725,-1.905) 7(-2.725,-3.175) 8(-2.725,-4.445) 9(2.725,-4.445) 10(2.725,-3.175) 11(2.725,-1.905) 12(2.725,-0.635) 13(2.725,0.635) 14(2.725,1.905) 15(2.725,3.175) 16(2.725,4.445)
  silkscreen extent -3.5,-5.1 1.6,5.12, body extent -3,-5.1 3,5.1, height 1.75
SOIC-8 [mil]
  rect 78x22 smd: 1(-97,75) 2(-97,25) 3(-97,-25) 4(-97,-75) 5(97,-75) 6(97,-25) 7(97,25) 8(97,75)
  silkscreen extent -117,-98 54,101, body extent -116,-96 116,96, height 65
SOIC-16 [mil]
  rect 78x22 smd: 1(-97,175) 2(-97,125) 3(-97,75) 4(-97,25) 5(-97,-25) 6(-97,-75) 7(-97,-125) 8(-97,-175) 9(97,-175) 10(97,-125) 11(97,-75) 12(97,-25) 13(97,25) 14(97,75) 15(97,125) 16(97,175)
  silkscreen extent -117,-197 51,201, body extent -122,-197 122,197, height 69
SOT65P210X110-6N [mm]
  rect 1.2x0.4 smd: 1(-0.95,0.65) 2(-0.95,0) 3(-0.95,-0.65) 4(0.95,-0.65) 5(0.95,0) 6(0.95,0.65)
  silkscreen extent -1.55,1.2 -0.35,1.2, body extent -1.05,-1 1.05,1, height 1
SOT-23 [mil]
  rect 52x22 smd: 1(-40,36) 2(-40,-36) 3(40,0)
  silkscreen extent -9,-59 28,59, body extent -60,-61 58,61, height 57
SOT-223 [mm]
  rect 1.3x0.95 smd: 1(-3.35,2.29) 2(-3.35,0) 3(-3.35,-2.29)
  rect 1.3x3.25 smd: 4(3.35,0)
  silkscreen extent -4,-3.25 1.75,3.25, body extent -3.5,-3.25 3.5,3.25, height 1.8
"YAGEO RES 0603_1608" [mm] "Chip Resistor, 2-Leads, Body 1.60x0.80mm"
  rect 0.9x0.8 smd: 1(-0.85,0) 2(0.85,0)
  silkscreen extent -1.5,-0.6 1.5,0.6, body extent -0.8,-0.4 0.8,0.4, height 0.45